# EAGLE board H3_MIDIController_Rev_2_SWBoard (EAGLE 7.6.0)
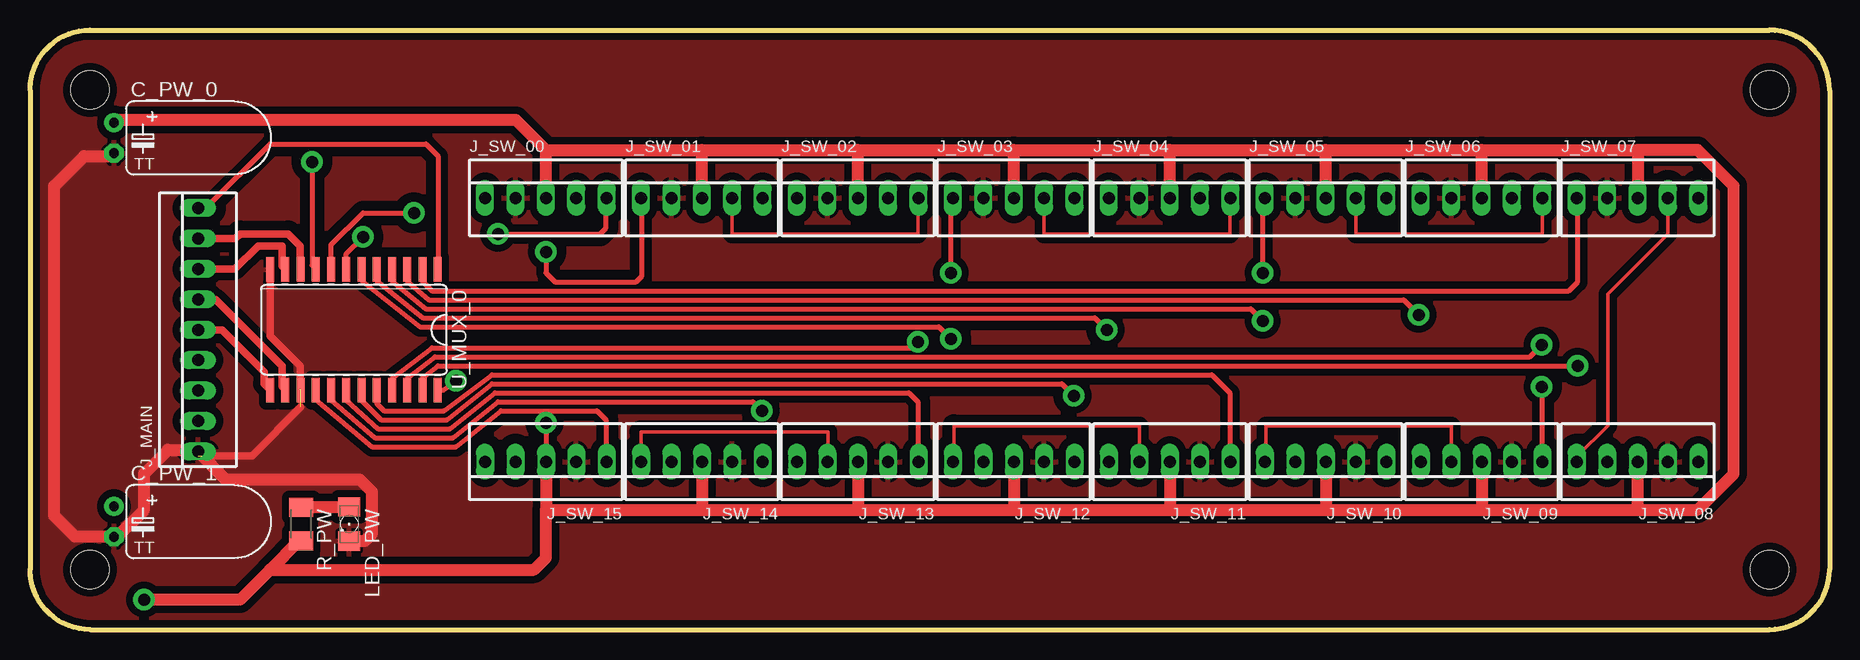
[diagram p0: board, top side]
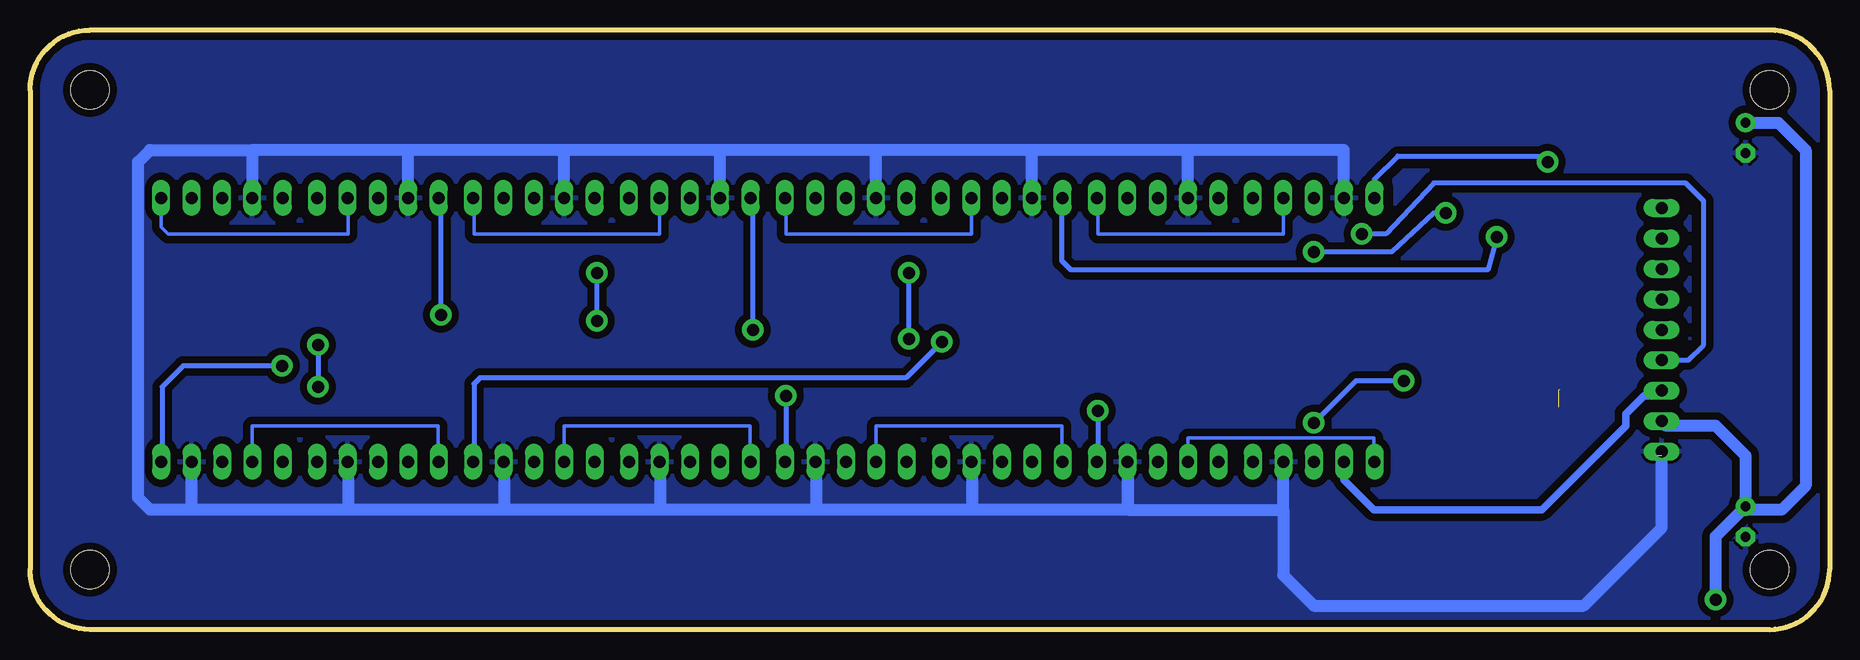
[diagram p1: board, bottom side, seen from below]

Size 150 x 50 mm. Coordinates in mm from the lower left corner, seen from the top.
Outline: 5,0 145,0 arc90 150,5 150,45 arc90 145,50 5,50 arc90 0,45 0,5 arc90 5,0
Copper layers (1*16): Top 0.035mm / dielectric 1.5mm / Bottom 0.035mm
Design rules "default *": minimum track width 12mil, minimum drill 25mil, track to track 15mil, track to pad 15mil, pad to pad 15mil, via to via 15mil, smd to smd 8mil, copper to edge 20mil, drill to drill 8mil, minimum pad ring 10mil, minimum via ring 15mil, stop-mask expansion 4mil, vias tented up to drill 0mil, thermal gap 10mil
Holes 3.2 mm at 145,45 145,5 5,5 5,45
vRestrict: area 19.2,19.2 to 35.2,30.2; area 0,14 to 17,36; area 36.5,34 to 140.5,50; area 36.5,0 to 140.5,16

## Footprints (pad centres in the part's own frame; a part is rotated, then mirrored left to right if it is on the bottom)
TT2D6L = drill 0.813 pad 1.6: + -1.27,0 | drill 0.813 pad 1.6 octagon: - 1.27,0
22-23-2091 = drill 1 long: 1 -10.16,0; 2 -7.62,0; 3 -5.08,0; 4 -2.54,0; 5 0,0; 6 2.54,0; 7 5.08,0; 8 7.62,0; 9 10.16,0
22-23-2051 = drill 1 long: 1 -5.08,0; 2 -2.54,0; 3 0,0; 4 2.54,0; 5 5.08,0
1206 = smd 1.6 x 1.803: A -1.422,0; C 1.422,0
M1206 = smd 1.6 x 2: 1 -1.4,0; 2 1.4,0
SO24W = smd 0.66 x 2.032: 1 -6.985,-5.029; 2 -5.715,-5.029; 3 -4.445,-5.029; 4 -3.175,-5.029; 5 -1.905,-5.029; 6 -0.635,-5.029; 7 0.635,-5.029; 8 1.905,-5.029; 9 3.175,-5.029; 10 4.445,-5.029; 11 5.715,-5.029; 12 6.985,-5.029; 13 6.985,5.029; 14 5.715,5.029; 15 4.445,5.029; 16 3.175,5.029; 17 1.905,5.029; 18 0.635,5.029; 19 -0.635,5.029; 20 -1.905,5.029; 21 -3.175,5.029; 22 -4.445,5.029; 23 -5.715,5.029; 24 -6.985,5.029

## Placement (x,y rotation side)
C_PW_0  10uF  [TT2D6L]  7,41 270 top
C_PW_1  100uF  [TT2D6L]  7,9 270 top
J_MAIN  22-23-2091  [22-23-2091]  14,25 90 top
J_SW_00  22-23-2051  [22-23-2051]  43,36 0 top
J_SW_01  22-23-2051  [22-23-2051]  56,36 0 top
J_SW_02  22-23-2051  [22-23-2051]  69,36 0 top
J_SW_03  22-23-2051  [22-23-2051]  82,36 0 top
J_SW_04  22-23-2051  [22-23-2051]  95,36 0 top
J_SW_05  22-23-2051  [22-23-2051]  108,36 0 top
J_SW_06  22-23-2051  [22-23-2051]  121,36 0 top
J_SW_07  22-23-2051  [22-23-2051]  134,36 0 top
J_SW_08  22-23-2051  [22-23-2051]  134,14 180 top
J_SW_09  22-23-2051  [22-23-2051]  121,14 180 top
J_SW_10  22-23-2051  [22-23-2051]  108,14 180 top
J_SW_11  22-23-2051  [22-23-2051]  95,14 180 top
J_SW_12  22-23-2051  [22-23-2051]  82,14 180 top
J_SW_13  22-23-2051  [22-23-2051]  69,14 180 top
J_SW_14  22-23-2051  [22-23-2051]  56,14 180 top
J_SW_15  22-23-2051  [22-23-2051]  43,14 180 top
LED_PW  [1206]  26.6,8.8 270 top
R_PW  330Ohm  [M1206]  22.6,8.8 270 top
U_MUX_0  4067D  [SO24W]  27,25 180 top

## Library data of the parts
C_PW_0 C_PW_1 = rcl
J_MAIN = con-molex; MF: MOLEX; MPN: 22-23-2091; OC_FARNELL: 1756827; OC_NEWARK: 56H0450
J_SW_00 J_SW_01-J_SW_09 J_SW_10-J_SW_15 = con-molex; MF: MOLEX; MPN: 22-23-2051; OC_FARNELL: 1462952; OC_NEWARK: 38C9178
LED_PW R_PW = adafruit
U_MUX_0 = 40xx

## Nets
5V: C_PW_0.+ C_PW_1.+ J_MAIN.2 J_SW_00.3 J_SW_01.3 J_SW_02.3 J_SW_03.3 J_SW_04.3 J_SW_05.3 J_SW_06.3 J_SW_07.3 J_SW_08.3 J_SW_09.3 J_SW_10.3 J_SW_11.3 J_SW_12.3 J_SW_13.3 J_SW_14.3 J_SW_15.3 R_PW.2 U_MUX_0.24
GND: C_PW_0.- C_PW_1.- J_MAIN.1 J_SW_00.2 J_SW_01.2 J_SW_02.2 J_SW_03.2 J_SW_04.2 J_SW_05.2 J_SW_06.2 J_SW_07.2 J_SW_08.2 J_SW_09.2 J_SW_10.2 J_SW_11.2 J_SW_12.2 J_SW_13.2 J_SW_14.2 J_SW_15.2 LED_PW.C U_MUX_0.12 U_MUX_0.15
LED_IN: J_MAIN.4 J_SW_00.5
LED_IN1: J_SW_00.4 J_SW_01.5
LED_IN2: J_SW_01.4 J_SW_02.5
LED_IN3: J_SW_02.4 J_SW_03.5
LED_IN4: J_SW_03.4 J_SW_04.5
LED_IN5: J_SW_04.4 J_SW_05.5
LED_IN6: J_SW_05.4 J_SW_06.5
LED_IN7: J_SW_07.4 J_SW_08.5
LED_IN8: J_SW_08.4 J_SW_09.5
LED_IN9: J_SW_09.4 J_SW_10.5
LED_IN10: J_SW_10.4 J_SW_11.5
LED_IN11: J_SW_11.4 J_SW_12.5
LED_IN12: J_SW_12.4 J_SW_13.5
LED_IN13: J_SW_13.4 J_SW_14.5
LED_IN14: J_SW_14.4 J_SW_15.5
LED_OUT: J_MAIN.3 J_SW_15.4
MUX_0_OUT: J_MAIN.9 U_MUX_0.1
MUX_A: J_MAIN.8 U_MUX_0.10
MUX_B: J_MAIN.7 U_MUX_0.11
MUX_C: J_MAIN.6 U_MUX_0.14
MUX_D: J_MAIN.5 U_MUX_0.13
N$1: J_SW_06.4 J_SW_07.5
N$2: LED_PW.A R_PW.1
SW_00: J_SW_00.1 U_MUX_0.9
SW_01: J_SW_01.1 U_MUX_0.8
SW_02: J_SW_02.1 U_MUX_0.7
SW_03: J_SW_03.1 U_MUX_0.6
SW_04: J_SW_04.1 U_MUX_0.5
SW_05: J_SW_05.1 U_MUX_0.4
SW_06: J_SW_06.1 U_MUX_0.3
SW_07: J_SW_07.1 U_MUX_0.2
SW_08: J_SW_08.1 U_MUX_0.23
SW_09: J_SW_09.1 U_MUX_0.22
SW_10: J_SW_10.1 U_MUX_0.21
SW_11: J_SW_11.1 U_MUX_0.20
SW_12: J_SW_12.1 U_MUX_0.19
SW_13: J_SW_13.1 U_MUX_0.18
SW_14: J_SW_14.1 U_MUX_0.17
SW_15: J_SW_15.1 U_MUX_0.16

## Tracks (layer width: path | path; a pad name or v marks a point on that pad's centre or on a via)
5V  (via drill 1)
  Top 0.406: U_MUX_0.24 34.47,19.97 v35.5,20.75 | v43,17.25 J_SW_15.3
  Top 1.016: J_SW_15.3 43,10 | 43,10 56,10 | 56,10 69,10 | 69,10 82,10 | 82,10 95,10 | 95,10 108,10 | 108,10 121,10 | 121,10 134,10 | 134,10 J_SW_08.3 | J_SW_14.3 56,10 | J_SW_13.3 69,10 | J_SW_12.3 82,10 | J_SW_11.3 95,10 | J_SW_10.3 108,10 | J_SW_09.3 121,10 | 43,40 56,40 | 56,40 69,40 | 69,40 82,40 | 82,40 95,40 | 95,40 108,40 | 108,40 121,40 | 121,40 134,40 | 134,40 J_SW_07.3 | J_SW_06.3 121,40 | J_SW_05.3 108,40 | J_SW_04.3 95,40 | J_SW_03.3 82,40 | J_SW_02.3 69,40 | J_SW_01.3 56,40 | 20,5 17.5,2.5 v9.5,2.5 | J_SW_00.3 43,40 | 43,40 40.5,42.5 7.23,42.5 C_PW_0.+ | R_PW.2 22.4,7.4 20,5 | 20,5 42,5 43,6 43,10 | 134,10 139,10 142,13 142,37 139,40 134,40
  Bottom 0.406: v35.5,20.75 39.5,20.75 v43,17.25
  Bottom 1.016: C_PW_0.+ 4.27,42.27 2,40 2,12 4,10 6.73,10 C_PW_1.+ | C_PW_1.+ 7,14.5 9.5,17 13.62,17 J_MAIN.2 | v9.5,2.5 9.5,7.77 C_PW_1.+
GND  (3 unrouted)
  Top 0.61: U_MUX_0.12 20.02,24.48 22.5,22 22.5,20.03 | 22.55,18.55 18.5,14.5 14.34,14.5 J_MAIN.1
  Top 1.016: C_PW_0.- 6.77,39.5 4.5,39.5 2,37 2,9.5 3.77,7.73 C_PW_1.- 7.23,7.73 9.5,10 9.5,13 11.5,15 13.84,15 J_MAIN.1 16.34,12.5 27.5,12.5 28.5,11.5 28.5,8 27.88,7.38 LED_PW.C
  Bottom 1.016: 58.5,10 58.5,14 J_SW_14.2 58.54,10.04 58.5,10 | 58.5,10 45.54,10 | 45.54,10 J_SW_15.2 | J_SW_13.2 71.5,14 71.5,10 84.5,10 | 84.5,10 97.5,10 | 97.5,10 110.5,10 | 110.5,10 123.5,10 | 123.5,10 136.54,10 | 136.54,10 J_SW_08.2 | J_SW_09.2 123.5,14 123.5,10 | J_SW_10.2 110.5,14 110.5,10 | J_SW_11.2 97.5,14 97.5,10 | J_SW_12.2 84.5,14 84.5,10 | J_SW_00.2 40.5,36 40.5,40 53.5,40 | 53.5,40 66.5,40 | 66.5,40 79.5,40 | 79.5,40 92.5,40 | 92.5,40 105.5,40 | 105.5,40 118.5,40 | 118.5,40 131.46,40 | 131.46,40 J_SW_07.2 | J_SW_06.2 118.5,36 118.5,40 | J_SW_05.2 105.5,36 105.5,40 | J_SW_04.2 92.5,36 92.5,40 | J_SW_03.2 79.5,36 79.5,40 | J_SW_02.2 66.5,36 66.5,40 | J_SW_01.2 53.5,36 53.5,40 | 58.5,10 123.5,10 | 136.54,10 139.75,10 140,10 141,11 141,39 140,40 131.46,40 | 45.54,10 45.54,4.54 43,2 20.5,2 14,8.5 14,14.5 13.5,15
  pour Top (isolate 0.61): 0,45 arc-90 5,50 145,50 arc-90 150,45 150,5 arc-90 145,0 5,0 arc-90 0,5
  pour Bottom (isolate 0.61): 0,45 arc-90 5,50 145,50 arc-90 150,45 150,5 arc-90 145,0 5,0 arc-90 0,5
LED_IN  (via drill 1)
  Top 0.406: v39,33 47.5,33 48,33.5 48,35.92 J_SW_00.5
  Bottom 0.406: J_MAIN.4 11.79,22.46 10.5,23.75 10.5,35.75 12,37.25 33,37.25 37,33 v39,33
LED_IN1
  Bottom 0.305: J_SW_01.5 61,36 61,33 45.54,33 J_SW_00.4
LED_IN2
  Top 0.305: J_SW_02.5 74,36 74,33 58.54,33 J_SW_01.4
LED_IN3
  Bottom 0.305: J_SW_03.5 87,36 87,33 71.54,33 J_SW_02.4
LED_IN4
  Top 0.305: J_SW_04.5 100,36 100,33 84.54,33 J_SW_03.4
LED_IN5
  Bottom 0.305: J_SW_05.5 113,36 113,33 97.54,33 J_SW_04.4
LED_IN6
  Top 0.305: J_SW_06.5 126.08,33.08 126,33 110.54,33 J_SW_05.4
LED_IN7
  Top 0.305: J_SW_08.5 128.92,14.42 131.5,17 131.5,28 136.5,33 136.5,35.96 J_SW_07.4
LED_IN8
  Bottom 0.305: J_SW_09.5 116,14 116,17 131.46,17 J_SW_08.4
LED_IN9
  Top 0.305: J_SW_10.5 103,14 103,17 118.46,17 J_SW_09.4
LED_IN10
  Bottom 0.305: J_SW_11.5 90,14 90,17 105.46,17 J_SW_10.4
LED_IN11
  Top 0.305: J_SW_12.5 77,14 77,17 92.46,17 J_SW_11.4
LED_IN12
  Bottom 0.305: J_SW_13.5 64,14 64,17 79.46,17 J_SW_12.4
LED_IN13
  Top 0.305: J_SW_13.4 66.5,14 66.5,16.5 50.92,16.5 J_SW_14.5
LED_IN14
  Bottom 0.305: J_SW_15.5 38,14 38,16 53.46,16 J_SW_14.4
LED_OUT
  Bottom 0.61: J_SW_15.4 40.46,12.46 38,10 24,10 17,17 17,18 15.5,19.5 14.42,19.5 J_MAIN.3
MUX_0_OUT
  Top 0.406: J_MAIN.9 14.66,35.16 20,40.5 33,40.5 34,39.5 34,30.04 U_MUX_0.1
MUX_A
  Top 0.61: J_MAIN.8 17.12,32.62 17.5,33 21.5,33 22.5,32 22.5,30.08 U_MUX_0.10
MUX_B
  Top 0.61: J_MAIN.7 17.08,30.08 19,32 21,32 21,30.31 U_MUX_0.11
MUX_C
  Top 0.61: J_MAIN.6 15.46,27.54 21,22 21,20.26 U_MUX_0.14
MUX_D
  Top 0.61: J_MAIN.5 16,25 19.5,21.5 19.5,20.49 U_MUX_0.13
N$1
  Bottom 0.305: J_SW_07.5 139.08,33.58 138.5,33 123.5,33 123.5,35.96 J_SW_06.4
N$2
  Top 0.61: 26.6,10.2 LED_PW.A
  Top 1.016: 26.6,10.2 R_PW.1
N$3
  pour Top (isolate 0.813): 0,45 arc-90 5,50 145,50 arc-90 150,45 150,5 arc-90 145,0 5,0 arc-90 0,5
N$4
  pour Bottom (isolate 0.813): 0,5 0,45 arc-90 5,50 145,50 arc-90 150,45 150,5 arc-90 145,0 5,0 arc-90
SW_00  (via drill 1)
  Top 0.406: v23.5,39 23.5,30.35 U_MUX_0.9
  Bottom 0.406: J_SW_00.1 37.92,37.58 36,39.5 24,39.5 v23.5,39
SW_01  (via drill 1)
  Top 0.406: U_MUX_0.8 25.09,32.09 27.75,34.75 v32,34.75 | v43,31.5 43,29.75 43.75,29 50.5,29 51,29.5 51,35.92 J_SW_01.1
  Bottom 0.406: v32,34.75 33,34.75 36.5,31.5 v43,31.5
SW_02  (via drill 1)
  Top 0.406: U_MUX_0.7 26.36,31.36 v27.75,32.75
  Bottom 0.406: v27.75,32.75 28.5,30 63.25,30 64,30.75 64,35.92 J_SW_02.1
SW_03  (via drill 1)
  Top 0.406: U_MUX_0.6 27.72,29.03 32.5,25.25 75.75,25.25 v76.75,24.25 | v76.75,29.75 76.75,35.83 J_SW_03.1
  Bottom 0.406: v76.75,24.25 v76.75,29.75
SW_04  (via drill 1)
  Top 0.406: U_MUX_0.5 28.91,29.09 32.75,26 88.75,26 v89.75,25
  Bottom 0.406: v89.75,25 89.75,35.83 J_SW_04.1
SW_05  (via drill 1)
  Top 0.406: U_MUX_0.4 30.18,29.07 33,26.75 101.75,26.75 v102.75,25.75 | v102.75,29.75 102.75,35.83 J_SW_05.1
  Bottom 0.406: v102.75,25.75 v102.75,29.75
SW_06  (via drill 1)
  Top 0.406: U_MUX_0.3 31.45,29.05 33.25,27.5 114.5,27.5 v115.75,26.25
  Bottom 0.406: v115.75,26.25 115.75,35.83 J_SW_06.1
SW_07
  Top 0.406: U_MUX_0.2 32.72,29.04 33.5,28.25 128.25,28.25 129,29 129,35.92 J_SW_07.1
SW_08  (via drill 1)
  Top 0.406: U_MUX_0.23 32.72,20.96 34,22 v129,22
  Bottom 0.406: v129,22 137.25,22 139,20.25 139,14.08 J_SW_08.1
SW_09  (via drill 1)
  Top 0.406: U_MUX_0.22 31.45,20.95 33.75,22.75 125,22.75 v126,23.75 | v126,20.25 126,14.08 J_SW_09.1
  Bottom 0.406: v126,23.75 v126,20.25
SW_10  (via drill 1)
  Top 0.406: U_MUX_0.21 30.18,20.93 33.5,23.5 73.5,23.5 v74,24
  Bottom 0.406: v74,24 77,21 112.5,21 113,20.5 113,14.08 J_SW_10.1
SW_11
  Top 0.406: U_MUX_0.20 28.91,18.84 29.5,18.25 34.5,18.25 38.5,21.25 98.5,21.25 100,19.75 100,14.08 J_SW_11.1
SW_12  (via drill 1)
  Top 0.406: U_MUX_0.19 27.64,19.11 29.25,17.5 34.75,17.5 38.5,20.5 86,20.5 v87,19.5
  Bottom 0.406: v87,19.5 87,14.08 J_SW_12.1
SW_13
  Top 0.406: U_MUX_0.18 26.36,19.14 29,16.75 35,16.75 38.75,19.75 73.25,19.75 74,19 74,14.08 J_SW_13.1
SW_14  (via drill 1)
  Top 0.406: U_MUX_0.17 25.09,19.16 28.75,16 35.25,16 39,19 60.25,19 v61,18.25
  Bottom 0.406: v61,18.25 61,14.08 J_SW_14.1
SW_15
  Top 0.406: U_MUX_0.16 23.82,19.18 28.5,15.25 35.5,15.25 39.25,18.25 47.25,18.25 48,17.5 48,14.08 J_SW_15.1